# EAGLE board schematicv3 (EAGLE 8.4.3)
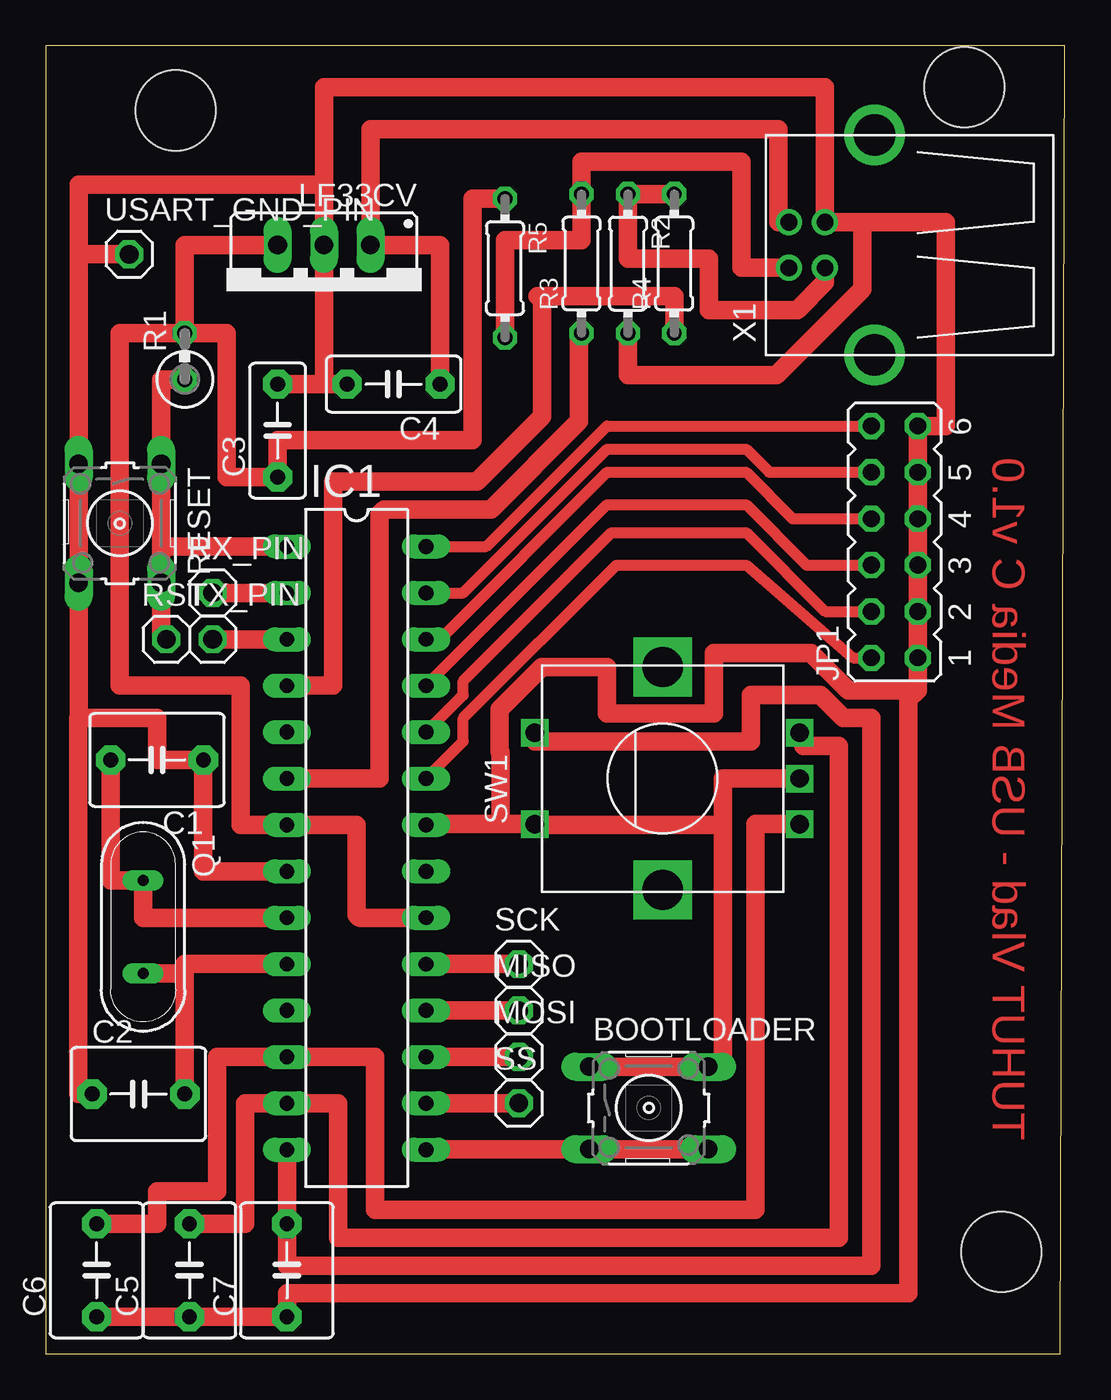
[diagram p0: board, top side]

Size 55.8 x 71.62 mm. Coordinates in mm from the lower left corner, seen from the top.
Outline: 0,0 55.55,0 55.8,71.62 0,71.62 0,0
Copper layers (1*16): Top 0.035mm / dielectric 1.5mm / Bottom 0.035mm
Design rules "default": minimum track width 6mil, minimum drill 0.35mm, track to track 6mil, track to pad 6mil, pad to pad 6mil, via to via 6mil, smd to smd 6mil, copper to edge 40mil, drill to drill 6mil, minimum pad ring 10mil, minimum via ring 8mil, stop-mask expansion 4mil, vias tented up to drill 0mil, thermal gap 10mil
Holes 4.4 mm at 52.32,5.59 7.11,68.07 50.29,69.34

## Footprints (pad centres in the part's own frame; a part is rotated, then mirrored left to right if it is on the bottom)
B3F-10XX = drill 1.016 long: 1 -3.251,2.261; 2 3.251,2.261; 3 -3.251,-2.261; 4 3.251,-2.261
C5B5 = drill 0.813 pad 1.6 octagon: 1 -2.54,0; 2 2.54,0
C5B3 = drill 0.813 pad 1.6 octagon: 1 -2.54,0; 2 2.54,0
DIL28-3 = drill 0.813 long: 1 -16.51,-3.81; 2 -13.97,-3.81; 3 -11.43,-3.81; 4 -8.89,-3.81; 5 -6.35,-3.81; 6 -3.81,-3.81; 7 -1.27,-3.81; 8 1.27,-3.81; 9 3.81,-3.81; 10 6.35,-3.81; 11 8.89,-3.81; 12 11.43,-3.81; 13 13.97,-3.81; 14 16.51,-3.81; 15 16.51,3.81; 16 13.97,3.81; 17 11.43,3.81; 18 8.89,3.81; 19 6.35,3.81; 20 3.81,3.81; 21 1.27,3.81; 22 -1.27,3.81; 23 -3.81,3.81; 24 -6.35,3.81; 25 -8.89,3.81; 26 -11.43,3.81; 27 -13.97,3.81; 28 -16.51,3.81
JP6Q = drill 0.914 octagon: 1 -6.35,-1.27; 2 -6.35,1.27; 3 -3.81,-1.27; 4 -3.81,1.27; 5 -1.27,-1.27; 6 -1.27,1.27; 7 1.27,-1.27; 8 1.27,1.27; 9 3.81,-1.27; 10 3.81,1.27; 11 6.35,-1.27; 12 6.35,1.27
TO220S = drill 1.016 long: 1 -2.54,-2.54; 2 0,-2.54; 3 2.54,-2.54
1X01 = drill 1.016 octagon: 1 0,0
QS = drill 0.61 long: 1 -2.54,0; 2 2.54,0
0309V = drill 0.813 octagon: 1 -1.27,0; 2 1.27,0
0204/7 = drill 0.813 octagon: 1 -3.81,0; 2 3.81,0
ALPS_EC12E_SW = drill 1 square: A -2.5,-7.5; B 2.5,-7.5; C 0,-7.5; D -2.5,7; E 2.5,7 | drill 2.2 square: GND1 -6.1,0; GND2 6.1,0
USB-B-H = drill 0.914: D+ 0,1.25; D- 1.981,1.25; GND 0,-1.25; VBUS 1.981,-1.25 | drill 2.286: P$1 -2.718,-6.02; P$2 -2.718,6.02

## Placement (x,y rotation side)
BOOTLOADER  [B3F-10XX]  33.02,13.46 0 top
C1  22p  [C5B5]  6.1,32.51 180 top
C2  22p  [C5B5]  5.08,14.22 0 top
C3  4u7  [C5B3]  12.7,50.55 90 top
C4  4u7  [C5B3]  19.05,53.09 180 top
C5  22n  [C5B5]  7.87,4.57 90 top
C6  22p  [C5B5]  2.79,4.57 90 top
C7  22p  [C5B5]  13.21,4.57 90 top
IC1  MEGA8-P  [DIL28-3]  17.02,27.69 270 top
JP1  [JP6Q]  46.48,44.45 90 top
LF33CV  [TO220S]  15.24,58.17 180 top
MISO  [1X01]  25.91,18.8 0 top
MOSI  [1X01]  25.91,16.26 0 top
Q1  16MHz  [QS]  5.33,23.37 270 top
R1  10k  [0309V]  7.62,54.61 90 top
R2  1M  [0204/7]  31.88,59.69 270 top
R3  68  [0204/7]  29.34,59.69 90 top
R4  68  [0204/7]  34.42,59.69 90 top
R5  1k5  [0204/7]  25.15,59.44 270 top
RESET  [B3F-10XX]  4.06,45.47 270 top
RST  [1X01]  6.6,39.12 0 top
RX_PIN  [1X01]  9.14,41.66 0 top
SCK  [1X01]  25.91,21.34 0 top
SS  [1X01]  25.91,13.72 0 top
SW1  EC12E_SW  [ALPS_EC12E_SW]  33.78,31.5 90 top
TX_PIN  [1X01]  9.14,39.12 0 top
USART_GND_PIN  [1X01]  4.57,60.2 0 top
X1  [USB-B-H]  42.67,60.71 180 top

## Library data of the parts
BOOTLOADER RESET = switch-omron; MPN: B3F-1000; OC_FARNELL: 176432; OC_NEWARK: 36M3542
C1-C7 = capacitor-wima
IC1 = atmel; OC_FARNELL: unknown; OC_NEWARK: unknown
JP1 = jumper
LF33CV = lf33
MISO MOSI RST RX_PIN SCK SS TX_PIN USART_GND_PIN = pinhead
Q1 = special
R1-R5 = resistor
SW1 = switch-alps
X1 = con-usb-3

## Nets
ATMEGA_RESET: IC1.1 R1.1 RESET.1 RESET.2 RST.1
BTN_BOOTLOADER: BOOTLOADER.3 BOOTLOADER.4 IC1.15
D+: IC1.4 R4.1
D-: IC1.6 R3.1
ENC_BTN: C7.2 IC1.14 SW1.E
ENC_PIN0: C5.2 IC1.13 SW1.B
ENC_PIN1: C6.2 IC1.12 SW1.A
GND: BOOTLOADER.1 BOOTLOADER.2 C1.1 C2.1 C3.2 C4.2 C5.1 C6.1 C7.1 IC1.8 IC1.22 JP1.1 JP1.3 JP1.5 JP1.7 JP1.9 JP1.11 LF33CV.2 R2.2 RESET.3 RESET.4 SW1.C SW1.D USART_GND_PIN.1 X1.GND
KEY0_JMP: IC1.23 JP1.2
KEY1_JMP: IC1.24 JP1.4
KEY2_JMP: IC1.25 JP1.6
KEY3_JMP: IC1.26 JP1.8
KEY4_JMP: IC1.27 JP1.10
KEY5_JMP: IC1.28 JP1.12
MISO: IC1.18 MISO.1
MOSI: IC1.17 MOSI.1
N$1: C1.2 IC1.9 Q1.1
N$2: C2.2 IC1.10 Q1.2
N$4: R2.1 R4.2 X1.D+
N$5: R3.2 R5.2 X1.D-
RX_PIN: IC1.2 RX_PIN.1
SCK: IC1.19 SCK.1
SS: IC1.16 SS.1
TX_PIN: IC1.3 TX_PIN.1
USB_VCC: C4.1 LF33CV.1 X1.VBUS
VCC: C3.1 IC1.7 IC1.20 LF33CV.3 R1.2 R5.1

## Tracks (layer width: path | path; a pad name or v marks a point on that pad's centre or on a via)
ATMEGA_RESET
  Top 1.016: R1.1 6.33,53.34 RESET.1 6.33,44.2 | 6.33,44.2 RESET.2 6.33,39.4 RST.1 | IC1.1 6.33,44.2
BTN_BOOTLOADER
  Top 1.016: IC1.15 20.83,11.2 BOOTLOADER.3 BOOTLOADER.4
D+
  Top 1.016: R4.1 34.42,57.91 27.18,57.91 | 27.18,57.91 26.92,57.91 | IC1.4 15.75,36.58 15.75,47.75 23.62,47.75 27.18,51.31 27.18,57.91
D-
  Top 1.016: IC1.6 18.29,31.5 18.29,45.97 18.54,46.23 24.38,46.23 29.21,51.05 29.21,55.75 R3.1
ENC_BTN
  Top 1.016: IC1.14 C7.2 13.21,4.83 45.21,4.83 45.21,34.8 43.69,34.8 42.42,36.07 38.61,36.07 38.61,33.53 26.78,33.53 SW1.E
ENC_PIN0
  Top 1.016: C5.2 10.92,7.11 10.92,13.72 IC1.13 16,13.72 16,6.35 43.43,6.35 43.43,33.27 41.5,33.27 SW1.B
ENC_PIN1
  Top 1.016: C6.2 6.1,7.11 6.1,8.89 9.4,8.89 9.4,16.26 IC1.12 18.03,16.26 18.03,7.87 38.86,7.87 38.86,29 SW1.A
GND
  Top 1.016: C3.2 C4.2 15.24,53.09 LF33CV.2 15.24,64.01 | 1.8,34.8 6.1,34.8 6.1,32.51 C1.1 8.64,26.42 IC1.8 | C2.1 1.78,14.22 1.78,34.8 1.8,34.8 | 15.24,64.01 1.8,64.01 1.8,60.2 | 1.8,60.2 RESET.3 RESET.4 1.8,34.8 | C6.1 C5.1 C7.1 13.21,3.3 47.24,3.3 47.24,35.81 47.75,36.32 | 15.24,64.01 15.24,69.34 42.67,69.34 X1.GND 44.7,61.96 | 44.7,61.96 49.28,61.96 49.28,50.8 JP1.11 JP1.9 JP1.7 JP1.5 JP1.3 JP1.1 47.75,36.32 | 47.75,36.32 43.94,36.32 41.91,38.35 36.58,38.35 36.58,35.05 30.73,35.05 30.73,37.59 27.18,37.59 24.86,35.27 24.86,32.97 24.89,32.94 24.89,29 | SW1.C 37.08,31.5 37.08,28.96 | 37.08,28.96 26.27,28.96 SW1.D 24.89,29 | 24.89,29 20.83,29 IC1.22 | 37.08,28.96 37.08,15.72 BOOTLOADER.2 BOOTLOADER.1 | R2.2 31.88,53.59 40.01,53.59 44.7,58.28 44.7,61.96 | 1.8,60.2 USART_GND_PIN.1
KEY0_JMP
  Top 0.61: IC1.23 22.86,33.53 22.86,34.8 31.24,43.18 38.35,43.18 44.2,38.1 JP1.2
KEY1_JMP
  Top 0.61: IC1.24 22.86,36.07 22.86,36.83 30.99,44.96 38.35,44.96 42.67,40.64 JP1.4
KEY2_JMP
  Top 0.61: IC1.25 30.73,46.48 38.35,46.48 41.66,43.18 JP1.6
KEY3_JMP
  Top 0.61: IC1.26 21.59,39.12 30.73,48.26 38.35,48.26 40.89,45.72 JP1.8
KEY4_JMP
  Top 0.61: IC1.27 22.86,41.66 30.73,49.53 38.35,49.53 39.62,48.26 JP1.10
KEY5_JMP
  Top 0.61: IC1.28 24.13,44.2 30.73,50.8 JP1.12
MISO
  Top 1.016: IC1.18 MISO.1
MOSI
  Top 1.016: IC1.17 MOSI.1
N$1
  Top 1.016: C1.2 3.56,25.91 Q1.1 5.33,23.88 IC1.9
N$2
  Top 1.016: 7.62,20.83 Q1.2 | C2.2 7.62,20.83 | IC1.10 7.62,21.34 7.62,20.83
N$4
  Top 1.016: R4.2 R2.1 31.88,59.94 36.32,59.94 36.32,57.15 41.15,57.15 42.67,58.67 X1.D+
N$5
  Top 1.016: R5.2 25.15,60.96 29.34,60.96 R3.2 29.34,65.28 38.1,65.28 38.1,59.46 X1.D-
RX_PIN
  Top 1.016: IC1.2 RX_PIN.1
SCK
  Top 1.016: IC1.19 SCK.1
SS
  Top 1.016: IC1.16 SS.1
TX_PIN
  Top 1.016: IC1.3 TX_PIN.1
USB_VCC
  Top 1.016: X1.VBUS 40.13,61.96 40.13,67.06 17.78,67.06 LF33CV.1 21.59,60.71 C4.1
VCC
  Top 1.016: R1.2 9.91,55.88 9.91,48.01 C3.1 12.7,50.04 23.37,50.04 23.37,63.25 R5.1 | LF33CV.3 7.62,60.71 R1.2 | R1.2 4.06,55.88 4.06,36.58 10.67,36.58 10.67,28.96 IC1.7 17.02,28.96 17.02,26.16 17.02,24.13 arc90 17.27,23.88 IC1.20

## Text on the board
Top: TUHUT Vlad - USB Media C v1.0